# EAGLE board PCB-ARD-DUEBOS (EAGLE 6.5.0)
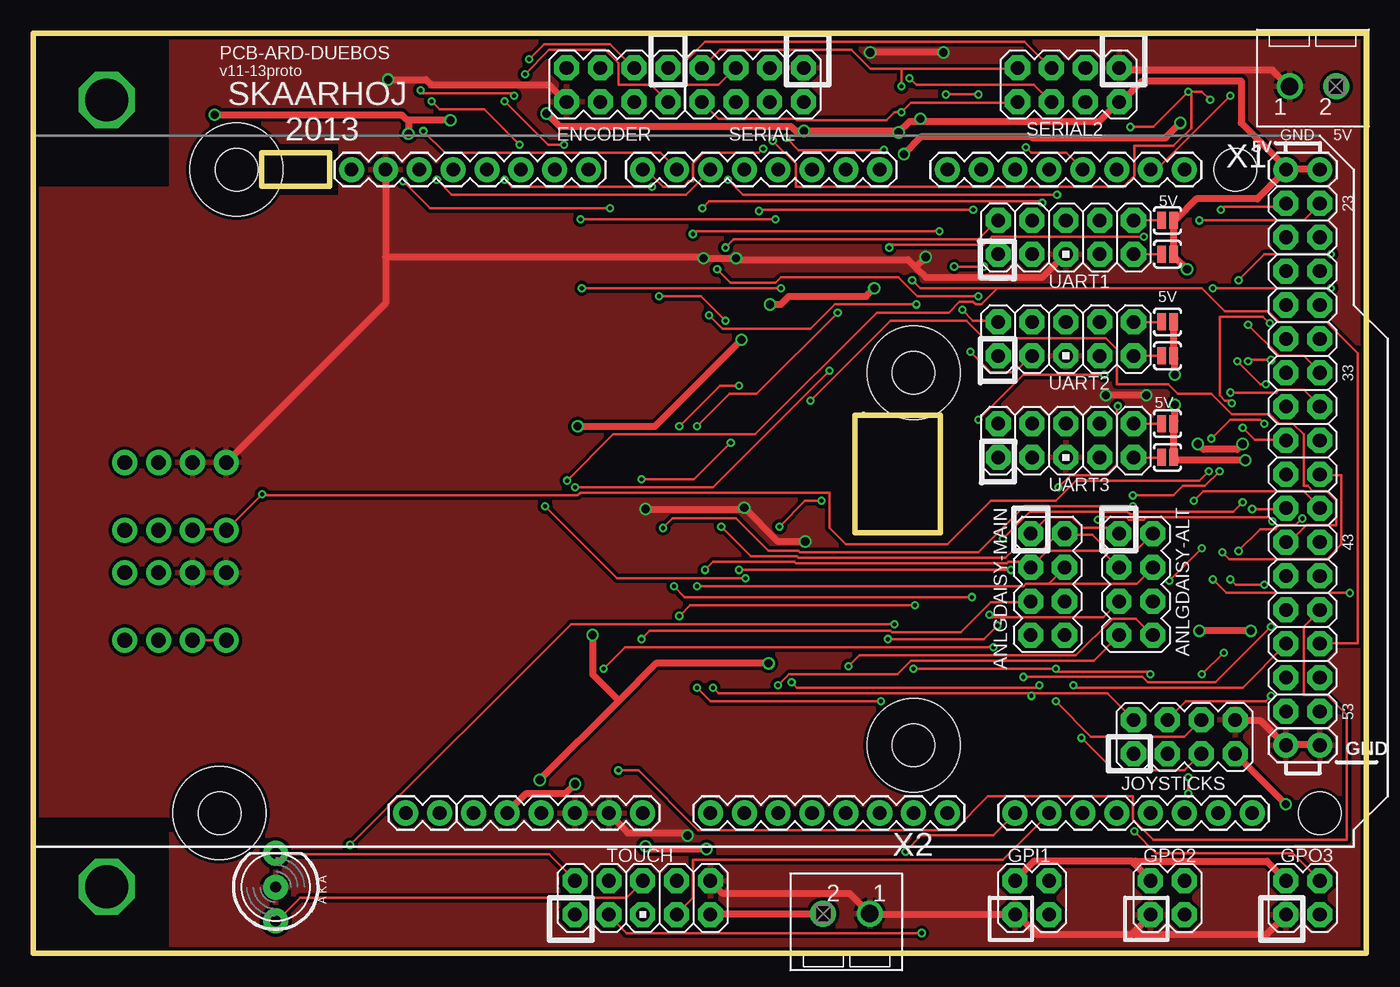
[diagram p0: board, top side]
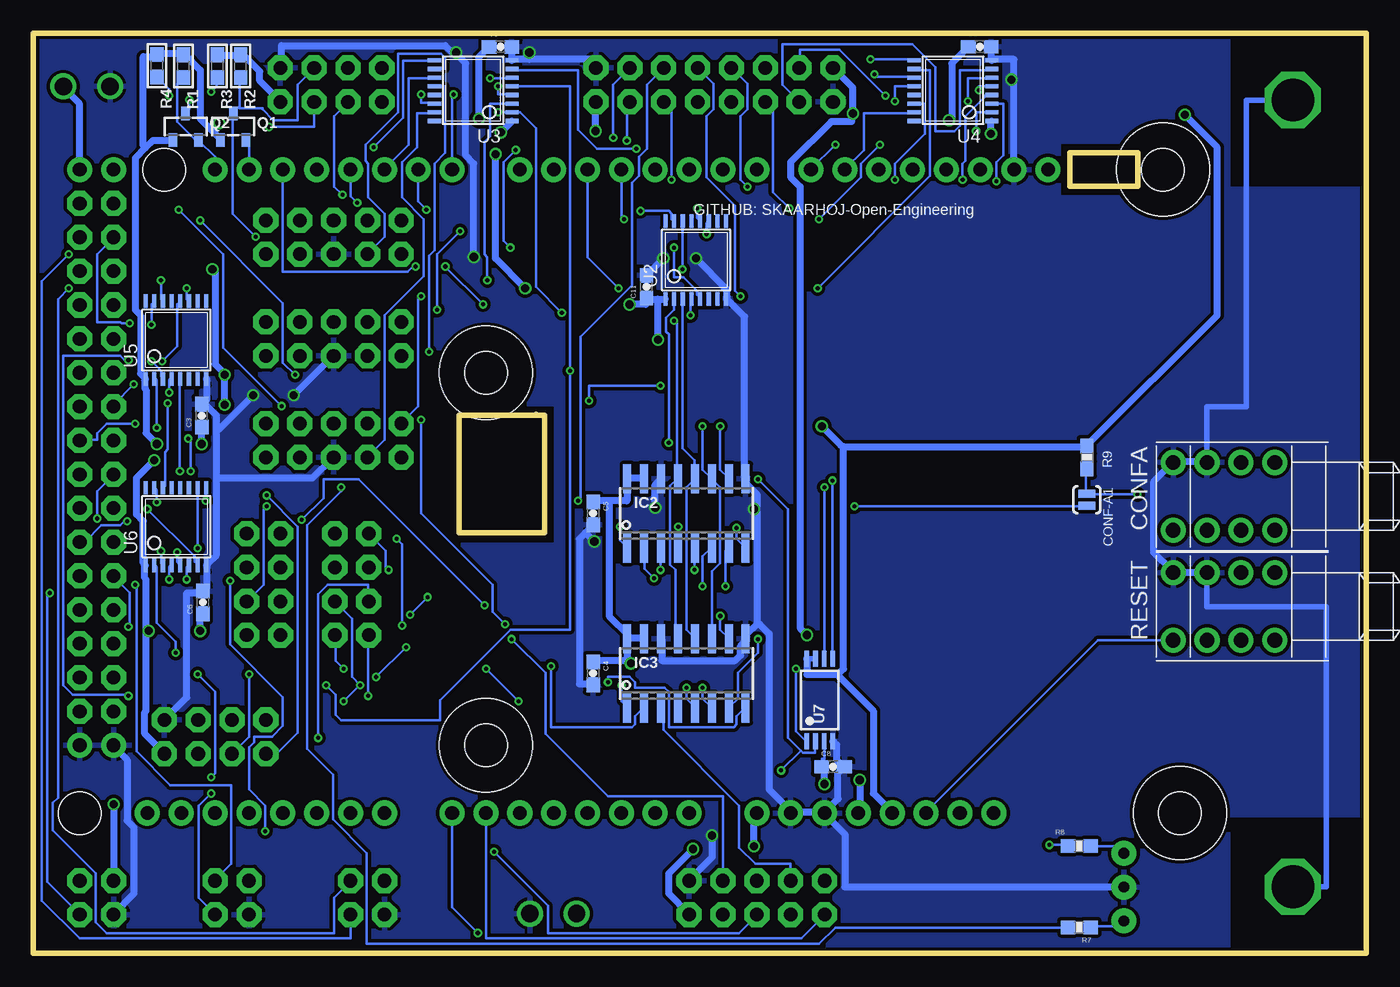
[diagram p1: board, bottom side, seen from below]

Size 100 x 69 mm. Coordinates in mm from the lower left corner, seen from the top.
Outline: 0,0 0,69 100,69 100,0 0,0
Copper layers (1*16): Top 0.035mm / dielectric 1.5mm / Bottom 0.035mm
Design rules "Fusion_eagle_rule_v1.1": minimum track width 6mil, minimum drill 12mil, track to track 6mil, track to pad 6mil, pad to pad 6mil, via to via 6mil, smd to smd 0mil, copper to edge 10mil, drill to drill 10mil, minimum pad ring 10mil, minimum via ring 6mil, stop-mask expansion 2mil, vias tented up to drill 100mil, thermal gap 10mil
Net classes: 0 default: width 0.203 mm, drill 0.305 mm, clearance 0.152 mm; 1 Power: width 0.508 mm, drill 0.61 mm, clearance 0.254 mm
Holes 7 mm at 13.97,10.53 15.24,58.78 66.04,43.55 66.04,15.61
tRestrict: area 0,0 to 10.2,10.2; area 0,57.5 to 10.2,68.9; area 61,30.8 to 68.6,41; area 16.5,56.9 to 22.9,60.7
bRestrict: area 0,57.5 to 10.2,68.9; area 0,0 to 10.2,10.2; area 61,30.8 to 68.6,41; area 16.5,56.9 to 22.9,60.7
Milling: 10 lines

## Footprints (pad centres in the part's own frame; a part is rotated, then mirrored left to right if it is on the bottom)
2X4 = drill 1.016 pad 1.88 octagon: 1 -3.81,-1.27; 2 -3.81,1.27; 3 -1.27,-1.27; 4 -1.27,1.27; 5 1.27,-1.27; 6 1.27,1.27; 7 3.81,-1.27; 8 3.81,1.27
0603-CAP = smd 1.1 x 1: 1 -0.85,0; 2 0.85,0
PUSHBUTTON = drill 1.1 pad 1.88: 1 2.54,2.54; 2 2.54,-2.54; 3 -2.54,2.54; 4 -2.54,-2.54
SJ_2S-NO = smd 0.635 x 1.27: 1 -0.45,0; 2 0.45,0
2X2 = drill 1.016 pad 1.88 octagon: 1 -3.81,-1.27; 2 -3.81,1.27; 3 -1.27,-1.27; 4 -1.27,1.27
SOIC16 = smd 0.6 x 2.2: 1 -4.445,-2.6; 2 -3.175,-2.6; 3 -1.905,-2.6; 4 -0.635,-2.6; 5 0.635,-2.6; 6 1.905,-2.6; 7 3.175,-2.6; 8 4.445,-2.6; 9 4.445,2.6; 10 3.175,2.6; 11 1.905,2.6; 12 0.635,2.6; 13 -0.635,2.6; 14 -1.905,2.6; 15 -3.175,2.6; 16 -4.445,2.6
1X02 = drill 1.016 pad 1.88: 1 0,0; 2 2.54,0
SOT23-R = smd 0.635 x 1.016: 1 -0.95,-1; 2 0.95,-1; 3 0,1
0603 = smd 1.1 x 1: 1 -0.85,0; 2 0.85,0
0603-RES = smd 1.1 x 1: 1 -0.85,0; 2 0.85,0
AVR_ICSP = drill 1.016 pad 1.88 octagon: 1 -1.27,5.08; 2 1.27,5.08; 3 -1.27,2.54; 4 1.27,2.54; 5 -1.27,0; 6 1.27,0; 7 -1.27,-2.54; 8 1.27,-2.54; 9 -1.27,-5.08; 10 1.27,-5.08
ARDUINO_MEGA = drill 1.016 pad 1.88: 0 63.5,50.8; 1 60.96,50.8; 2 58.42,50.8; 3 55.88,50.8; 3.3V 35.56,2.54; 4 53.34,50.8; 5 50.8,50.8; 5V@0 38.1,2.54; 5V@1 93.98,50.8; 5V@2 96.52,50.8; 6 48.26,50.8; 7 45.72,50.8; 8 41.656,50.8; 9 39.116,50.8; 10 36.576,50.8; 11 34.036,50.8; 12 31.496,50.8; 13 28.956,50.8; 14 68.58,50.8; 15 71.12,50.8; 16 73.66,50.8; 17 76.2,50.8; 18 78.74,50.8; 19 81.28,50.8; 20 83.82,50.8; 21 86.36,50.8; A0 50.8,2.54; A1 53.34,2.54; A2 55.88,2.54; A3 58.42,2.54; A4 60.96,2.54; A5 63.5,2.54; A6 66.04,2.54; A7 68.58,2.54; A8 73.66,2.54; A9 76.2,2.54; A10 78.74,2.54; A11 81.28,2.54; A12 83.82,2.54; A13 86.36,2.54; A14 88.9,2.54; A15 91.44,2.54; AREF 23.876,50.8; GND@0 40.64,2.54; GND@1 43.18,2.54; GND@2 93.98,7.62; GND@3 96.52,7.62; GND@4 26.416,50.8; RESET 33.02,2.54; VIN 45.72,2.54 | drill 1.016 pad 1.88 octagon: 22 93.98,48.26; 23 96.52,48.26; 24 93.98,45.72; 25 96.52,45.72; 26 93.98,43.18; 27 96.52,43.18; 28 93.98,40.64; 29 96.52,40.64; 30 93.98,38.1; 31 96.52,38.1; 32 93.98,35.56; 33 96.52,35.56; 34 93.98,33.02; 35 96.52,33.02; 36 93.98,30.48; 37 96.52,30.48; 38 93.98,27.94; 39 96.52,27.94; 40 93.98,25.4; 41 96.52,25.4; 42 93.98,22.86; 43 96.52,22.86; 44 93.98,20.32; 45 96.52,20.32; 46 93.98,17.78; 47 96.52,17.78; 48 93.98,15.24; 49 96.52,15.24; 50 93.98,12.7; 51 96.52,12.7; 52 93.98,10.16; 53 96.52,10.16 | hole 3.2: 15.24,50.8; 13.97,2.54; 66.04,35.56; 66.04,7.62; 90.17,50.8; 96.52,2.54
TSSOP16 = smd 0.305 x 0.991: 1 -3.575,-2.918; 2 -2.925,-2.918; 3 -2.275,-2.918; 4 -1.625,-2.918; 5 -0.975,-2.918; 6 -0.325,-2.918; 7 0.325,-2.918; 8 0.975,-2.918; 9 0.975,2.918; 10 0.325,2.918; 11 -0.325,2.918; 12 -0.975,2.918; 13 -1.625,2.918; 14 -2.275,2.918; 15 -2.925,2.918; 16 -3.575,2.918
TSSOP8-4.4MM = smd 1.2 x 0.35: 1 -3.1,0.975; 2 -3.1,0.325; 3 -3.1,-0.325; 4 -3.1,-0.975; 5 3.1,-0.975; 6 3.1,-0.325; 7 3.1,0.325; 8 3.1,0.975
3.2MMPAD = drill 3.2 octagon: P$1 0,0
LED5MM-BICOLOR = drill 0.813 pad 1.88: A2 2.54,0; A3 -2.54,0; K1 0,0
MSTBV2-3.5 = drill 1.3: 1 -1.75,0.02; 2 1.75,0.02

## Placement (x,y rotation side)
ANLGDAISY-ALT  M04X2  [2X4]  82.72,27.67 270 top
ANLGDAISY-MAIN  M04X2  [2X4]  76.11,27.67 270 top
C1  0.1uF  [0603-CAP]  64.95,67.98 0 bottom
C2  0.1uF  [0603-CAP]  29,68 0 bottom
C3  0.1uF  [0603-CAP]  87.36,40.33 90 bottom
C4  0.1uF  [0603-CAP]  58,21 270 bottom
C5  0.1uF  [0603-CAP]  58,33 270 bottom
C6  0.1uF  [0603-CAP]  87.27,26.32 90 bottom
C8  0.1uF  [0603-CAP]  40,14 0 bottom
C11  0.1uF  [0603-CAP]  54,50 90 bottom
CONF  [PUSHBUTTON]  9.4,34.27 90 bottom
CONF-A1  SOLDERJUMPERNO  [SJ_2S-NO]  20.95,34.02 270 bottom
CONFA  [PUSHBUTTON]  11.94,34.27 90 bottom
ENCODER  M04X2  [2X4]  43.81,65.14 180 top
GPI1  M02X2  [2X2]  77.47,4.17 0 top
GPO2  M02X2  [2X2]  87.63,4.17 0 top
GPO3  M02X2  [2X2]  97.79,4.17 0 top
IC2  MCP3008SOIC  [SOIC16]  51,33 0 bottom
IC3  MCP3008SOIC  [SOIC16]  51,21 0 bottom
JOYSTICKS  M04X2  [2X4]  86.36,16.24 0 top
JP1  [1X02]  27.94,10.53 0 top
Q1  BSS138  [SOT23-R]  85,62 0 bottom
Q2  BSS138  [SOT23-R]  88.57,62 0 bottom
R1  1K5  [0603]  88.73,66.54 90 bottom
R2  1K5  [0603]  84.44,66.54 90 bottom
R3  1K5  [0603]  86.19,66.54 90 bottom
R4  1K5  [0603]  90.72,66.57 90 bottom
R7  270R  [0603-RES]  21.52,1.95 180 bottom
R8  270R  [0603-RES]  21.52,8.04 180 bottom
R9  10K  [0603-RES]  20.95,37.2 270 bottom
RESET  [PUSHBUTTON]  11.94,26.02 90 bottom
RESETA  [PUSHBUTTON]  9.4,26.02 90 bottom
SERIAL  M04X2  [2X4]  53.98,65.14 180 top
SERIAL2  M04X2  [2X4]  77.66,65.14 180 top
SJ1  SOLDERJUMPERNO  [SJ_2S-NO]  85.09,54.98 0 top
SJ2  SOLDERJUMPERNO  [SJ_2S-NO]  85.09,52.44 180 top
SJ3  SOLDERJUMPERNO  [SJ_2S-NO]  85.09,44.81 180 top
SJ4  SOLDERJUMPERNO  [SJ_2S-NO]  85.09,47.35 0 top
SJ5  SOLDERJUMPERNO  [SJ_2S-NO]  85.09,39.73 0 top
SJ6  SOLDERJUMPERNO  [SJ_2S-NO]  85.09,37.2 180 top
TOUCH  M05X2PTH  [AVR_ICSP]  45.72,4.17 90 top
U1  ARDUINO-MEGAFULL  [ARDUINO_MEGA]  0,7.99 0 top
U2  74HC4050D  [TSSOP16]  49,52 0 bottom
U3  74HC4050D  [TSSOP16]  67,66 90 bottom
U4  74HC4050D  [TSSOP16]  31,66 90 bottom
U5  74HC4050D  [TSSOP16]  88,46 0 bottom
U6  74HC4050D  [TSSOP16]  88,32 0 bottom
U7  [TSSOP8-4.4MM]  41,19 90 bottom
U$1  GNDPAD  [3.2MMPAD]  5.5,64 0 top
U$15  LEDBICOLOR-AKA  [LED5MM-BICOLOR]  18.19,4.97 90 top
U$20  GNDPAD  [3.2MMPAD]  5.5,5 0 top
UART1  M05X2PTH  [AVR_ICSP]  77.47,53.7 90 top
UART2  M05X2PTH  [AVR_ICSP]  77.47,46.09 90 top
UART3  M05X2PTH  [AVR_ICSP]  77.47,38.47 90 top
X1  MSTBV23.5MM  [MSTBV2-3.5]  96,65 0 top
X2  MSTBV23.5MM  [MSTBV2-3.5]  61,3 180 top

## Library data of the parts
ANLGDAISY-ALT ANLGDAISY-MAIN C1-C6 C8 C11 CONF-A1 ENCODER JOYSTICKS JP1 R7-R9 SERIAL SERIAL2 SJ1-SJ6 TOUCH UART1-UART3 = SparkFun
CONF CONFA GPI1 GPO2 GPO3 IC2 IC3 RESET RESETA U1-U6 U$1 U$15 U$20 X1 X2 = SKAARHOJ
Q1 Q2 R1-R4 U7 = microbuilder

## Nets
3.3V [Power]: C2.1 C3.1 C8.1 C11.1 Q1.1 Q2.1 R1.2 R4.2 R9.1 U1.3.3V U2.1 U4.1 U5.1 U7.3 U7.7 U7.8
5V [Power]: C1.1 C4.1 C5.1 C6.1 ENCODER.7 GPI1.2 GPO2.2 GPO3.2 IC2.15 IC2.16 IC3.15 IC3.16 JOYSTICKS.7 R2.2 R3.2 SERIAL2.2 SERIAL.2 SJ1.2 SJ2.1 SJ3.1 SJ4.2 SJ5.2 SJ6.1 U1.5V@0 U1.5V@1 U1.5V@2 U3.1 U6.1 X1.2
A0: IC2.1 SERIAL2.5 SERIAL.5
A1: CONF-A1.2 IC2.2
A2: ANLGDAISY-ALT.1 ANLGDAISY-MAIN.1 IC2.3
A3: ANLGDAISY-ALT.2 ANLGDAISY-MAIN.2 IC2.4
A4: ANLGDAISY-ALT.3 ANLGDAISY-MAIN.3 IC2.5
A5: ANLGDAISY-ALT.4 ANLGDAISY-MAIN.4 IC2.6
A6: ANLGDAISY-ALT.5 IC2.7
A6_3.3V: TOUCH.1 U1.A6
A7: ANLGDAISY-ALT.6 IC2.8
A7_3.3V: TOUCH.3 U1.A7
A8: ANLGDAISY-ALT.7 IC3.1
A8_3.3V: TOUCH.5 U1.A8
A9: ANLGDAISY-ALT.8 IC3.2
A9_3.3V: TOUCH.7 U1.A9
A10: IC3.3 TOUCH.4
A11: IC3.4
A12: ANLGDAISY-MAIN.7 IC3.5 JOYSTICKS.2
A13: ANLGDAISY-MAIN.8 IC3.6 JOYSTICKS.3
A14: ANLGDAISY-MAIN.5 IC3.7 JOYSTICKS.5
A15: ANLGDAISY-MAIN.6 IC3.8 JOYSTICKS.6
ADC1_CS: IC2.10 U1.42
ADC2_CS: IC3.10 U1.43
D2_3.3V: U1.2 U4.10
D2_5.0V: ENCODER.3 U4.9
D3_3.3V: U1.3 U4.6
D3_5.0V: ENCODER.6 U4.7
D4: U1.4
D5_3.3V: U1.5 U4.4
D5_5.0V: ENCODER.5 U4.5
D6_3.3V: U1.6 U4.2
D6_5.0V: ENCODER.4 U4.3
D7_3.3V: U1.7 U3.7
D7_5.0V: SERIAL2.6 SERIAL.6 U3.6
D8_3.3V: U1.8 U4.12
D8_5.0V: ENCODER.2 U4.11
D9_3.3V: U1.9 U4.15
D9_5.0V: ENCODER.1 U4.14
D22: R7.2 U1.22
D23: R8.2 U1.23
D24_3.3V: U1.24 U6.14
D24_5.0V: TOUCH.8 U6.15
D37: CONF-A1.1 CONF.3 CONFA.3 R9.2 U1.37
EEPROM_CS: U1.44 U7.1
EXT1: U1.25
EXT2: U1.26
EXT3: U1.27
EXT4: U1.28
EXT5: U1.29
EXT6: U1.30
EXT7: U1.31
EXT8: U1.32
GND [Power]: C1.2 C2.2 C3.2 C4.2 C5.2 C6.2 C8.2 C11.2 CONF.1 CONFA.1 ENCODER.8 GPI1.1 GPO2.1 GPO3.1 IC2.9 IC2.14 IC3.9 IC3.14 JOYSTICKS.8 RESET.1 RESETA.1 SERIAL2.1 SERIAL.1 TOUCH.10 U1.GND@0 U1.GND@1 U1.GND@2 U1.GND@3 U1.GND@4 U2.8 U3.8 U4.8 U5.8 U6.8 U7.4 U$1.P$1 U$15.K1 U$20.P$1 UART1.5 UART2.5 UART3.5 X1.1 X2.1
GPI1-1_3.3V: U1.33 U5.15
GPI1-1_5.0V: GPI1.3 U5.14
GPI1-2_3.3V: U1.34 U5.12
GPI1-2_5.0V: GPI1.4 U5.11
GPO2-1_3.3V: U1.38 U6.3
GPO2-1_5.0V: GPO2.3 U6.2
GPO2-2_3.3V: U1.39 U6.5
GPO2-2_5.0V: GPO2.4 U6.4
GPO3-1_3.3V: U1.40 U6.7
GPO3-1_5.0V: GPO3.3 U6.6
GPO3-2_3.3V: U1.41 U6.9
GPO3-2_5.0V: GPO3.4 U6.10
MISO_3.3V: U1.47 U2.2 U7.2
MISO_5.0V: IC2.12 IC3.12 U2.3
MOSI_3.3V: U1.49 U3.3 U7.5
MOSI_5.0V: IC2.11 IC3.11 SERIAL2.8 SERIAL.8 U3.2
N$1: U5.6
N$2: U5.10
N$3: SJ6.2 UART3.9
N$4: U5.9
N$5: U5.7
N$6: SJ3.2 UART2.9
N$9: SJ2.2 UART1.9
N$10: SJ1.1 UART1.10
N$12: SJ4.1 UART2.10
N$13: SJ5.1 UART3.10
N$17: R8.1 TOUCH.2 U$15.A2
N$18: U1.53
N$19: U1.52
N$20: U1.51
N$21: U1.50
N$22: R7.1 TOUCH.6 U$15.A3
RESET: RESET.3 RESETA.3 U1.RESET
RXD1_3.3V: U1.19 U2.4
RXD1_5.0V: U2.5 UART1.2
RXD2_3.3V: U1.17 U2.12
RXD2_5.0V: U2.11 UART2.2
RXD3_3.3V: U1.15 U2.15
RXD3_5.0V: U2.14 UART3.2
SCL_3.3V: Q2.2 R1.1 U1.21
SCL_5.0V: Q2.3 R3.1 SERIAL2.4 SERIAL.4
SCLK_3.3V: U1.48 U3.5 U7.6
SCLK_5.0V: IC2.13 IC3.13 SERIAL2.7 SERIAL.7 U3.4
SDA_3.3V: Q1.2 R4.1 U1.20
SDA_5.0V: Q1.3 R2.1 SERIAL2.3 SERIAL.3
SW1_3.3V: U1.35 U5.4
SW1_5.0: JOYSTICKS.1 U5.5
SW2_3.3V: U1.36 U5.2
SW2_5.0: JOYSTICKS.4 U5.3
TXD1_3.3V: U1.18 U3.9
TXD1_5.0V: U3.10 UART1.3
TXD2_3.3V: U1.16 U3.11
TXD2_5.0V: U3.12 UART2.3
TXD3_3.3V: U1.14 U3.14
TXD3_5.0V: U3.15 UART3.3
VIN [Power]: TOUCH.9 U1.VIN X2.2

## Tracks (layer width: path | path; a pad name or v marks a point on that pad's centre or on a via)
3.3V  (via drill 0.61)
  Top 0.508: v87.38,38.2 87.78,37.8 90.32,37.8 v90.73,38.2 | v40.64,12.7 39.93,11.99 36.98,11.99 35.56,10.57 U1.3.3V | 28.14,62.48 v28.14,61.47 | v31.29,62.48 28.14,62.48 | v53.14,46.02 46.63,39.52 v40.84,39.52 | v13.61,62.89 27.64,62.89 27.94,62.59 28.14,62.48 | v86.06,62.28 84.94,61.16 74.98,61.16 74.88,61.27 66.65,61.27 v65.33,59.94 | v63.09,49.89 62.48,49.28 56.69,49.28 56.08,48.67 v55.27,48.67
  Bottom 0.203: U7.3 40.64,15.9 40.64,14.61 40.85,14.61 C8.1
  Bottom 0.406: U7.7 U7.8
  Bottom 0.508: 86.61,61.72 87.48,62.59 87.48,66.24 88.7,67.46 R1.2 88.9,67.46 90.63,67.46 R4.2 90.93,67.26 91.75,67.26 91.75,60.55 91.59,60.4 | 86.61,61.72 85.95,61.06 Q1.1 | 91.59,60.4 91.03,60.96 89.61,60.96 Q2.1 | 91.59,60.4 92.35,59.64 92.35,48.26 91.95,47.85 91.95,43.48 91.64,43.18 U5.1 91.64,42.88 91.64,42.37 91.54,42.27 91.54,39.01 v90.73,38.2 | v87.38,38.2 87.38,39.42 C3.1 | v40.64,12.7 40.64,13.72 40.84,13.92 C8.1 | v28.14,61.47 28.14,62.38 U4.1 | v31.29,62.48 31.09,62.69 31.09,66.75 29.87,67.97 C2.1 | 53.14,49.07 53.95,49.07 C11.1 54.05,48.87 54.05,48.67 v55.27,48.67 | 53.14,49.07 52.63,49.07 U2.1 | 39.22,38 21.03,38 R9.1 20.83,38.2 11.18,47.85 11.18,60.45 v13.61,62.89 | 39.22,38 39.22,21.34 39.62,20.93 | 39.62,20.93 41.96,20.93 41.96,22.05 U7.8 | v53.14,46.02 53.14,49.07 | v40.84,39.52 39.42,38.1 39.22,38 | U1.3.3V 35.56,10.57 36.98,11.99 36.98,18.19 39.52,20.73 39.62,20.93 | v86.06,62.28 86.61,61.72 | v65.33,59.94 65.33,52.12 v63.09,49.89
5V  (via drill 0.61)
  Top 0.508: 82.55,6.76 83.82,5.49 GPO2.2 | 82.55,6.76 82.4,6.91 75.08,6.91 73.66,5.49 GPI1.2 | GPO3.2 93.98,5.49 92.56,6.91 82.7,6.91 82.55,6.76 | SJ4.2 85.55,44.91 SJ3.1 85.65,44.6 v85.65,43.38 | v91.34,24.18 v87.48,24.18 | v90.93,36.98 85.85,36.98 85.75,37.08 SJ6.1 85.55,37.29 SJ5.2 85.65,39.93 v85.65,41.15 | v93.98,11.18 90.22,14.94 JOYSTICKS.7 | 43.94,18.95 46.74,21.74 v55.17,21.74 | 43.94,18.95 v38,13.01 | U1.5V@1 93.98,58.73 91.85,56.59 87.27,56.59 85.75,55.07 SJ1.2 85.55,54.97 85.55,52.53 SJ2.1 85.65,52.22 v86.56,51.31 | U1.5V@2 96.52,58.83 94.18,58.83 U1.5V@1 | 66.55,62.38 79.96,62.38 81.38,63.8 SERIAL2.2 81.69,63.91 83.21,65.43 90.63,65.43 90.63,62.28 93.88,59.03 U1.5V@1 | 66.55,62.38 65.73,62.38 v64.92,61.57 64.72,61.67 v57.81,61.67 57.2,61.67 56.9,61.98 39.52,61.98 v38.51,62.99 | v66.55,62.59 66.55,62.38 | 43.94,18.95 41.96,20.93 v41.96,23.88
  Bottom 0.508: 91.64,29.06 91.64,28.14 91.54,28.04 91.54,24.18 | 91.54,24.18 91.54,18.19 91.64,18.09 91.64,16.46 90.22,15.04 JOYSTICKS.7 | 91.64,29.06 U6.1 | v87.48,24.18 87.48,25.2 87.27,25.4 C6.1 | v91.34,24.18 91.54,24.18 | v90.93,36.98 92.25,35.66 92.25,32.92 91.75,32.41 91.75,29.26 91.64,29.06 | v85.65,41.15 v85.65,43.38 85.75,43.59 86.36,44.2 86.36,51.1 v86.56,51.31 | v93.98,11.18 GPO3.2 | 55.47,21.95 57.91,21.95 C4.1 | 55.47,21.95 55.47,23.57 IC3.16 | IC3.15 54.25,23.67 55.27,23.67 IC3.16 | 56.79,33.93 55.47,33.93 55.47,35.56 IC2.16 55.27,35.66 54.25,35.66 IC2.15 | 56.79,33.93 57.91,33.93 C5.1 | 56.79,33.93 56.79,25.3 55.37,23.88 IC3.16 | v38,13.01 38,10.67 38.1,10.57 U1.5V@0 | v55.17,21.74 55.27,21.84 55.47,21.95 | U1.5V@2 96.52,63.7 97.74,64.92 X1.2 | R3.2 86.16,67.36 84.53,67.36 R2.2 84.23,67.36 83.01,66.14 83.01,65.43 81.48,63.91 SERIAL2.2 | v64.92,61.57 64.11,62.38 U3.1 | v66.55,62.59 66.55,67.26 65.84,67.97 C1.1 | ENCODER.7 39.93,66.34 38.51,64.92 v38.51,62.99 38.61,62.79 38.61,62.38 40.13,62.38 43.18,59.33 43.18,58.22 42.47,57.51 42.47,24.38 v41.96,23.88 | v57.81,61.67 57.81,63.8 SERIAL.2
A0  (via drill 0.3)
  Top 0.203: v55.98,32 57.91,33.93 v59.13,33.93 | SERIAL2.5 76.3,66.45 74.37,68.38 50.39,68.38 48.97,66.95 48.97,65.13 51.41,65.13 52.63,66.34 SERIAL.5
  Bottom 0.203: v55.98,32 55.98,30.99 55.47,30.48 IC2.1 | v59.13,33.93 58.93,34.14 58.93,46.23 55.07,50.09 55.07,57.81 54.56,58.32 54.56,59.74 53.95,60.35 53.95,65.13 52.73,66.34 SERIAL.5
A1  (via drill 0.3)
  Top 0.203: v38.41,33.53 43.79,28.14 v53.44,28.14
  Bottom 0.203: v38.41,33.53 21.03,33.53 CONF-A1.2 | v53.44,28.14 54.15,28.85 54.15,30.38 IC2.2
A2  (via drill 0.3)
  Top 0.203: v73.36,28.75 v52.93,28.75 | ANLGDAISY-ALT.1 81.38,31.5 80.97,31.9 78.74,31.9 77.93,32.72 76.1,32.72 74.88,31.5 ANLGDAISY-MAIN.1
  Bottom 0.203: v52.93,28.75 52.93,30.38 IC2.3 | v73.36,28.75 73.56,28.96 73.56,30.18 74.78,31.39 ANLGDAISY-MAIN.1
A3  (via drill 0.3)
  Top 0.203: v51.61,32 53.85,29.77 57.3,29.77 57.4,29.67 72.95,29.67 73.56,30.28 75.69,30.28 76.81,31.39 77.32,31.39 ANLGDAISY-MAIN.2 77.42,31.39 79.45,31.39 80.57,30.28 82.8,30.28 83.92,31.39 ANLGDAISY-ALT.2
  Bottom 0.203: v51.61,32 51.61,30.48 IC2.4
A4  (via drill 0.3)
  Top 0.203: v50.39,28.75 51,29.36 57.1,29.36 57.2,29.26 73.05,29.26 73.15,29.36 74.37,29.36 74.78,28.96 ANLGDAISY-MAIN.3 74.88,28.96 76.1,30.18 80.16,30.18 81.38,28.96 ANLGDAISY-ALT.3
  Bottom 0.203: v50.39,28.75 50.39,30.38 IC2.5
A5  (via drill 0.3)
  Top 0.203: v49.78,27.53 74.27,27.53 74.47,27.74 76.2,27.74 76.25,27.79 | 76.25,27.79 77.32,28.85 ANLGDAISY-MAIN.4 | ANLGDAISY-ALT.4 83.92,28.85 82.8,27.74 76.3,27.74 76.25,27.79
  Bottom 0.203: v49.78,27.53 49.78,29.77 49.17,30.38 IC2.6
A6  (via drill 0.3)
  Top 0.203: v48.06,27.53 48.87,26.72 v70.41,26.72 | v71.73,25.4 71.93,25.2 80.26,25.2 81.38,26.31 ANLGDAISY-ALT.5
  Bottom 0.203: v48.06,27.53 48.06,30.18 47.85,30.38 IC2.7 | v71.73,25.4 v70.41,26.72
A6_3.3V
  Bottom 0.203: U1.A6 66.04,1.12 42.37,1.12 40.64,2.85 TOUCH.1
A7  (via drill 0.3)
  Top 0.203: v47.24,31.9 47.95,32.61 52.73,32.61 55.17,30.18 57.4,30.18 57.51,30.07 70.92,30.07 74.37,33.53 v82.5,33.53
  Bottom 0.203: v47.24,31.9 47.24,31.09 46.63,30.48 IC2.8 | v82.5,33.53 82.7,33.33 82.7,27.64 83.92,26.42 ANLGDAISY-ALT.6
A7_3.3V  (via drill 0.3)
  Top 0.203: v66.65,1.52 44.5,1.52 43.18,2.85 TOUCH.3
  Bottom 0.203: v66.65,1.52 68.58,3.45 U1.A7
A8  (via drill 0.3)
  Top 0.203: v55.88,20.12 56.69,20.93 64.82,20.93 65.84,21.95 79.55,21.95 81.38,23.77 ANLGDAISY-ALT.7
  Bottom 0.203: v55.88,20.12 55.88,18.9 55.47,18.49 IC3.1
A8_3.3V  (via drill 0.3)
  Top 0.203: v65.43,7.62 66.65,8.84 72.03,8.84 73.66,10.46 U1.A8
  Bottom 0.203: v65.43,7.62 61.37,3.56 61.37,1.52 47.04,1.52 45.72,2.85 TOUCH.5
A9  (via drill 0.3)
  Top 0.203: v61.16,21.54 61.98,22.35 78.23,22.35 80.97,25.09 82.7,25.09 83.92,23.88 ANLGDAISY-ALT.8
  Bottom 0.203: v61.16,21.54 61.16,16.97 55.07,16.97 54.86,17.17 54.86,17.78 54.25,18.39 IC3.2
A9_3.3V
  Top 0.203: TOUCH.7 48.26,2.95 49.48,4.17 49.48,7.01 72.75,7.01 76.2,10.46 U1.A9
A10
  Bottom 0.203: TOUCH.4 43.18,6.71 45.82,6.71 47.04,7.92 47.04,11.07 52.73,16.76 52.73,18.29 52.83,18.39 IC3.3
A12  (via drill 0.3)
  Top 0.203: v51,19.91 51.41,19.51 74.88,19.51 | 74.88,19.51 80.57,19.51 82.5,17.58 JOYSTICKS.2 | 74.88,19.51 v74.88,19.3
  Bottom 0.203: v51,19.91 51,19.1 50.39,18.49 IC3.5 | v74.88,19.3 74.88,23.77 ANLGDAISY-MAIN.7
A13  (via drill 0.3)
  Top 0.203: v49.78,19.91 50.8,18.9 v63.6,18.9 | v66.04,21.34 v76.71,21.34 76.91,21.13 83.62,21.13 v83.82,20.93
  Bottom 0.203: v49.78,19.91 49.78,19.1 49.17,18.49 IC3.6 | v66.04,21.34 v63.6,18.9 | v76.71,21.34 77.32,21.95 77.32,23.77 ANLGDAISY-MAIN.8 | v83.82,20.93 83.82,16.26 85.04,15.04 JOYSTICKS.3
A14  (via drill 0.3)
  Top 0.203: v45.62,23.57 46.23,24.18 64.31,24.18 64.41,24.08 69.6,24.08 71.83,26.31 74.78,26.31 ANLGDAISY-MAIN.5 | v78.64,16.15 81.08,13.72 86.36,13.72 87.58,14.94 JOYSTICKS.5
  Bottom 0.203: v45.62,23.57 45.62,22.55 47.14,21.03 47.14,19.1 47.75,18.49 IC3.7 | v78.64,16.15 78.64,26.92 77.93,27.64 74.88,27.64 74.88,26.42 ANLGDAISY-MAIN.5
A15  (via drill 0.3)
  Top 0.203: v56.9,20.32 57.3,19.91 75.29,19.91 v75.49,20.12 | v76.71,18.9 79.35,16.26 86.36,16.26 87.58,17.48 JOYSTICKS.6
  Bottom 0.203: v56.9,20.32 56.9,20.73 55.27,20.73 54.86,20.32 54.86,19.91 52.63,19.91 52.32,19.61 52.32,16.97 47.45,16.97 47.24,17.17 47.24,17.78 46.63,18.39 IC3.8 | ANLGDAISY-MAIN.6 77.32,26.31 76.1,25.09 76.1,20.73 v75.49,20.12 75.59,20.12 75.59,20.02 v76.71,18.9
ADC1_CS  (via drill 0.3)
  Top 0.203: v48.46,39.52 51.51,42.57 v52.93,42.57 | v58.32,41.45 64.31,47.45 70,47.45 71.32,46.13 80.47,46.13 81.28,45.31 81.28,42.67 85.14,42.67 85.85,41.96 88.39,41.96 89.92,40.44 92.76,40.44 93.47,39.73 94.49,39.73 95.3,38.91 95.3,35.05 95.61,35.05 96.01,34.65 97.03,34.65 97.74,33.93 97.74,32.11 95.5,32.11 94.28,30.89 93.98,30.89 U1.42
  Bottom 0.203: v48.46,39.52 48.46,36.27 47.85,35.66 IC2.10 | v52.93,42.57 58.32,42.57 v58.32,41.45
ADC2_CS  (via drill 0.3)
  Top 0.203: v48.46,25.3 49.28,26.11 v66.14,26.11 | v79.86,32.51 80.06,32.72 81.99,32.72 82.19,32.51 83.31,32.51 83.52,32.72 92.66,32.72 v92.96,32.41
  Bottom 0.203: v48.46,25.3 48.46,24.28 47.85,23.67 IC3.10 | v66.14,26.11 75.59,35.56 78.23,35.56 78.23,34.14 v79.86,32.51 | v92.96,32.41 93.17,32.41 93.47,32.11 94.89,32.11 96.11,30.89 96.52,30.89 U1.43
D2_3.3V  (via drill 0.3)
  Top 0.203: v56.08,49.89 v41.15,49.89
  Bottom 0.203: v41.15,49.89 32.72,58.32 32.72,66.24 33.83,66.24 U4.10 | v56.08,49.89 58.42,52.22 U1.2
D2_5.0V  (via drill 0.3)
  Top 0.203: v37.19,67.06 38.3,68.17 43.28,68.17 45.01,66.45 ENCODER.3
  Bottom 0.203: v37.19,67.06 33.93,67.06 U4.9
D3_3.3V  (via drill 0.3)
  Top 0.203: v29.87,63.91 30.48,63.3 33.83,63.3 v36.47,60.66 | v55.68,55.07 v41.05,55.07
  Bottom 0.203: v29.87,63.91 29.87,65.63 28.14,65.63 U4.6 | v36.47,60.66 37.9,59.23 37.9,58.22 v41.05,55.07 | v55.68,55.07 55.88,55.27 U1.3
D3_5.0V
  Bottom 0.203: U4.7 28.14,66.24 30.48,66.24 30.48,62.08 30.89,61.67 32.31,61.67 32.31,66.45 34.04,68.17 43.79,68.17 43.79,65.13 42.57,63.91 ENCODER.6
D5_3.3V  (via drill 0.3)
  Top 0.203: v30.28,58.01 31.39,56.9 48.97,56.9 50.8,58.73 U1.5
  Bottom 0.203: v30.28,58.01 30.28,59.23 30.07,59.44 30.07,62.79 28.65,64.21 28.65,64.31 28.14,64.31 U4.4
D5_5.0V  (via drill 0.3)
  Top 0.203: v29.06,64.72 29.26,64.52 35.87,64.52 v36.07,64.31
  Bottom 0.203: v29.06,64.72 29.06,65.02 28.14,65.02 U4.5 | v36.07,64.31 39.52,67.77 42.47,67.77 42.47,66.45 ENCODER.5
D6_3.3V  (via drill 0.3)
  Top 0.203: v29.26,61.67 30.89,60.05 47.04,60.05 48.26,58.83 U1.6
  Bottom 0.203: v29.26,61.67 29.26,63.09 28.14,63.09 U4.2
D6_5.0V  (via drill 0.3)
  Top 0.203: v27.74,57.91 29.77,55.88 v43.28,55.88
  Bottom 0.203: v27.74,57.91 27.74,59.33 27.23,59.84 27.23,63.7 28.04,63.7 U4.3 | v43.28,55.88 44.5,57.1 44.5,63.3 45.01,63.8 ENCODER.4
D7_3.3V  (via drill 0.3)
  Top 0.203: v54.76,60.35 54.46,60.05 50.29,60.05 49.48,59.23 49.48,57.91 49.17,57.91 48.77,57.51 47.24,57.51 46.02,58.73 45.72,58.73 U1.7
  Bottom 0.203: v54.76,60.35 57.71,60.35 59.13,61.77 59.13,66.24 64.01,66.24 U3.7
D7_5.0V  (via drill 0.3)
  Top 0.203: v65.73,65.63 66.24,65.13 75.08,65.13 76.3,63.91 SERIAL2.6 | v52.12,58.01 53.24,56.9 v76.81,56.9
  Bottom 0.203: v65.73,65.63 64.11,65.63 U3.6 | v52.12,58.01 52.12,63.3 52.63,63.8 SERIAL.6 | v76.81,56.9 77.42,57.51 77.42,62.79 76.4,63.8 SERIAL2.6
D8_3.3V  (via drill 0.3)
  Top 0.203: v35.36,63.91 38.61,60.66 v39.83,60.66
  Bottom 0.203: v35.36,63.91 35.36,65.02 33.93,65.02 U4.12 | v39.83,60.66 41.66,58.83 U1.8
D8_5.0V  (via drill 0.3)
  Top 0.203: v36.88,65.94 38.71,67.77 42.88,67.77 43.89,66.75 43.89,65.13 46.33,65.13 47.55,63.91 ENCODER.2
  Bottom 0.203: v36.88,65.94 36.88,65.73 33.93,65.73 U4.11
D9_3.3V
  Bottom 0.203: U4.15 33.93,62.99 37.69,62.99 37.69,60.25 39.12,58.83 U1.9
D9_5.0V  (via drill 0.3)
  Top 0.203: v35.36,58.01 35.87,57.51 v46.43,57.51
  Bottom 0.203: v35.36,58.01 35.36,59.23 33.12,61.47 33.12,63.7 33.83,63.7 U4.14 | v46.43,57.51 46.94,58.01 46.94,62.79 46.43,63.3 46.43,65.23 47.55,66.34 ENCODER.1
D22  (via drill 0.3)
  Top 0.203: v76.91,34.95 77.83,35.87 80.47,35.87 81.28,36.68 81.28,41.05 v81.38,41.05 | v89.1,55.78 89.31,55.98 93.78,55.98 93.98,56.19 U1.22
  Bottom 0.203: v76.91,34.95 76.91,34.65 79.45,32.11 79.45,15.34 77.52,13.41 77.52,10.06 74.98,7.52 74.98,0.71 41.05,0.71 39.83,1.93 22.45,1.93 R7.2 | v81.38,41.05 85.75,45.41 85.75,52.43 v89.1,55.78
D23  (via drill 0.3)
  Top 0.203: v23.77,8.13 40.34,24.69 v64.62,24.69 | v70.92,40.03 74.27,43.38 v80.37,43.38 | v87.48,54.97 95.3,54.97 96.52,56.19 U1.23
  Bottom 0.203: v23.77,8.13 22.45,8.13 R8.2 | v64.62,24.69 65.53,25.6 65.53,27.64 70.92,33.02 v70.92,40.03 | v80.37,43.38 81.28,44.3 81.28,48.77 v87.48,54.97
D24_3.3V  (via drill 0.3)
  Top 0.203: v89.92,41.25 89.71,41.45 89.41,41.45 89,41.86 89,47.75 92.25,47.75 v92.76,47.24
  Bottom 0.203: v89.92,41.25 89.92,37.8 90.12,37.59 90.12,35.05 90.22,34.95 U6.14 | v92.76,47.24 93.37,47.24 93.47,47.35 95.2,47.35 95.2,52.43 93.98,53.65 U1.24
D24_5.0V  (via drill 0.3)
  Top 0.203: v90.73,33.83 90.02,33.12 82.91,33.12 82.7,32.92 82.3,32.92 82.09,33.12 74.78,33.12 v72.75,31.09 | v72.34,24.59 71.32,23.57 v64.11,23.57
  Bottom 0.203: v90.73,33.83 90.73,34.75 90.83,34.85 U6.15 | v72.75,31.09 72.34,30.68 v72.34,24.59 | v64.11,23.57 61.57,21.03 61.57,16.46 56.9,11.79 48.26,11.79 TOUCH.8
D37  (via drill 0.3)
  Top 0.203: CONF.3 11.99,31.8 14.43,31.8 CONFA.3 14.53,31.8 v17.17,34.44 17.17,34.34 40.84,34.34 41.05,34.54 59.74,34.54 59.74,31.9 60.96,30.68 68.58,30.68 71.83,33.93 76.71,33.93 78.23,35.46 87.48,35.46 v88.19,36.17 | v92.35,39.73 92.05,40.03 89.81,40.03 v88.39,38.61
  Bottom 0.203: R9.2 21.03,36.27 21.03,34.54 CONF-A1.1 20.93,34.44 v17.17,34.44 | v92.35,39.73 94.49,39.73 95.2,39.01 95.2,38.51 96.52,38.51 U1.37 | v88.39,38.61 88.19,38.41 v88.19,36.17
EEPROM_CS  (via drill 0.3)
  Top 0.203: v42.77,21.34 44.4,22.96 v72.03,22.96 | v74.27,20.73 83.21,20.73 83.62,20.32 88.7,20.32 v92.86,24.49
  Bottom 0.203: v42.77,21.34 42.77,16.66 42.06,15.95 U7.1 | v74.27,20.73 v72.03,22.96 | v92.86,24.49 92.76,24.59 92.76,27.03 93.98,28.25 U1.44
GND  (via drill 0.61)
  Top 0.508: TOUCH.10 50.8,5.38 51.71,4.47 61.27,4.47 62.69,3.05 X2.1 62.99,2.95 73.66,2.95 GPI1.1 73.86,2.85 75.29,1.42 82.4,1.42 82.55,1.57 | 82.55,1.57 83.82,2.85 GPO2.1 | GPO3.1 93.98,2.85 92.56,1.42 82.7,1.42 82.55,1.57 | U1.GND@3 96.52,15.65 93.98,15.65 U1.GND@2 93.78,15.75 92.05,17.48 90.22,17.48 JOYSTICKS.8 | v83.52,41.86 v80.47,41.86 | v26.62,65.53 29.46,65.53 29.87,65.13 38.71,65.13 39.93,63.91 ENCODER.8 | U1.GND@4 26.42,52.22 | 26.42,52.22 26.42,48.77 14.53,36.88 CONFA.1 | SERIAL2.1 81.48,66.34 81.58,66.24 92.96,66.24 94.18,65.02 X1.1 | v68.28,67.56 v62.79,67.56 | v57.91,30.89 55.88,30.89 v53.34,33.43 53.14,33.33 v45.92,33.33 | 66.19,51.46 65.63,52.02 52.93,52.02 v52.73,52.12 v50.29,52.12 50.09,52.22 26.42,52.22 | 66.19,51.46 66.95,50.7 75.69,50.7 77.42,52.43 UART1.5 | 66.19,51.46 v66.95,52.22 | v49.07,8.84 48.87,9.04 44.6,9.04 43.18,10.46 U1.GND@1
  Bottom 0.406: U$1.P$1 9,64 9,41 11.94,41 CONF.1 | U$20.P$1 3,5 3,26 11.94,26 RESETA.1
  Bottom 0.508: U5.8 86.97,43.08 86.97,41.55 87.27,41.25 C3.2 87.07,41.15 86.26,40.34 86.26,39.32 | 86.97,29.06 86.97,27.43 87.17,27.23 C6.2 87.48,27.03 88.49,27.03 88.49,19.2 90.12,17.58 JOYSTICKS.8 | 86.97,29.06 U6.8 | 86.26,35.66 86.26,29.87 86.87,29.26 86.97,29.06 | 86.26,35.66 86.26,39.32 | 86.26,35.66 79.05,35.66 77.52,37.19 UART3.5 | v80.47,41.86 77.52,44.81 UART2.5 | v83.52,41.86 86.06,39.32 86.26,39.32 | GPO3.1 93.98,2.95 92.46,4.47 92.46,9.45 92.96,9.96 92.96,14.53 93.98,15.54 U1.GND@2 | RESETA.1 12.09,28.55 14.43,28.55 RESET.1 14.63,28.75 15.95,30.07 15.95,35.36 14.53,36.78 CONFA.1 14.22,36.88 12.09,36.88 CONF.1 | C2.2 28.14,67.97 28.14,67.06 U4.8 27.84,67.06 26.42,67.06 26.42,65.53 | U1.GND@4 26.42,65.53 | v26.62,65.53 26.42,65.53 | C1.2 64.11,67.06 U3.8 63.91,67.06 62.79,67.06 | 62.79,67.06 57.81,67.06 57.81,66.45 SERIAL.1 | v62.79,67.56 62.79,67.06 | SERIAL2.1 81.38,66.45 81.38,68.07 69.09,68.07 68.58,67.56 v68.28,67.56 68.17,67.36 67.56,66.75 67.56,59.84 66.95,59.23 v66.95,52.22 | U7.4 39.93,15.85 39.73,15.65 39.73,14.53 39.22,14.02 C8.2 39.32,13.82 39.62,13.51 39.62,11.58 40.64,10.57 U1.GND@0 | U$15.K1 18.29,4.98 39.12,4.98 39.12,8.94 40.54,10.36 U1.GND@0 | U1.GND@0 40.84,10.57 43.18,10.57 U1.GND@1 43.28,10.77 44.81,12.29 44.81,23.98 45.52,24.69 45.72,24.69 | 58.57,31.55 58.01,32.11 C5.2 | 58.57,31.55 59.03,31.09 59.03,20.22 58.01,20.22 C4.2 | v53.34,33.43 53.34,35.15 52.93,35.56 IC2.14 | 58.57,31.55 v57.91,30.89 | 46.63,23.67 IC3.9 | IC3.9 46.63,23.37 46.94,23.06 46.94,22.35 47.35,21.95 52.83,21.95 52.83,23.57 IC3.14 | v52.73,52.12 53.95,50.9 C11.2 | v50.29,52.12 47.95,49.78 47.95,49.28 U2.8 47.95,49.07 46.63,47.75 46.63,35.66 IC2.9 46.53,35.36 46.53,35.26 45.72,34.44 45.72,33.33
  Bottom 0.508: 45.72,24.69 46.53,23.88 IC3.9 | 45.72,33.33 45.72,24.69 | v45.92,33.33 45.72,33.33 | v49.07,8.84 49.07,7.21 50.8,5.49 TOUCH.10
  pour Top: 0,0 100,0 100,69 0,69
  pour Bottom: 0,0 100,0 100,69 0,69
GPI1-1_3.3V  (via drill 0.3)
  Top 0.203: v91.14,47.14 93.47,44.81 95.3,44.81 96.52,43.59 U1.33
  Bottom 0.203: v91.14,47.14 91.14,48.67 90.93,48.87 U5.15
GPI1-1_5.0V  (via drill 0.3)
  Top 0.203: v90.42,50.49 92.35,52.43 v97.33,52.43
  Bottom 0.203: v90.42,50.49 90.42,49.07 90.32,48.97 U5.14 | v97.33,52.43 99.36,50.39 99.36,3.96 96.52,1.12 76.2,1.12 GPI1.3
GPI1-2_3.3V  (via drill 0.3)
  Top 0.203: v90.32,44.4 92.05,42.67 v92.46,42.67
  Bottom 0.203: v90.32,44.4 89.2,45.52 89.2,48.67 89,48.87 U5.12 | v92.46,42.67 93.98,41.15 U1.34
GPI1-2_5.0V  (via drill 0.3)
  Top 0.203: v97.33,49.89 v88.49,49.89
  Bottom 0.203: v88.49,49.89 88.49,49.07 88.39,48.97 U5.11 | v97.33,49.89 98.15,49.07 98.15,11.68 98.55,11.28 98.55,9.25 95.3,5.99 95.3,2.34 94.49,1.52 77.42,1.52 77.42,4.17 76.2,5.38 GPI1.4
GPO2-1_3.3V  (via drill 0.3)
  Top 0.203: v90.42,30.18 92.05,31.8 93.17,31.8 93.47,32.11 94.69,32.11 v95.2,32.61
  Bottom 0.203: v90.42,30.18 90.42,29.26 90.32,29.16 U6.3 | v95.2,32.61 95.2,34.65 93.98,35.87 U1.38
GPO2-1_5.0V  (via drill 0.3)
  Top 0.203: v87.68,20.93 v89.31,22.55 | v86.67,11.99 v86.67,13.21
  Bottom 0.203: v89.31,22.55 89.31,23.37 90.73,24.79 90.73,28.96 90.83,29.06 U6.2 | v87.68,20.93 86.36,19.61 86.36,13.51 v86.67,13.21 | v86.67,11.99 87.58,11.07 87.58,4.17 86.36,2.95 GPO2.3
GPO2-2_3.3V  (via drill 0.3)
  Top 0.203: v89.2,30.07 89.71,29.57 97.03,29.57 98.15,30.68 98.15,35.87 96.52,35.87 U1.39
  Bottom 0.203: v89.2,30.07 89.2,29.36 89,29.16 U6.5
GPO2-2_5.0V  (via drill 0.3)
  Top 0.203: v89.81,28.04 90.22,27.64 v92.35,27.64
  Bottom 0.203: v89.81,28.04 89.81,28.96 89.71,29.06 U6.4 | v92.35,27.64 92.25,27.53 92.25,15.14 89.71,12.6 85.14,12.6 85.14,6.71 86.36,5.49 GPO2.4
GPO3-1_3.3V  (via drill 0.3)
  Top 0.203: v91.44,33.33 93.98,33.33 U1.40
  Bottom 0.203: v91.44,33.33 87.88,29.77 87.88,29.36 87.68,29.16 U6.7
GPO3-1_5.0V  (via drill 0.3)
  Top 0.203: v88.49,28.04 89.51,27.03 v98.75,27.03
  Bottom 0.203: v88.49,28.04 88.49,28.96 88.39,29.06 U6.6 | v98.75,27.03 98.96,26.82 98.96,5.38 96.52,2.95 GPO3.3
GPO3-2_3.3V  (via drill 0.3)
  Top 0.203: v87.07,33.93 87.78,34.65 95.3,34.65 96.52,33.43 U1.41
  Bottom 0.203: v87.07,33.93 87.07,34.85 U6.9
GPO3-2_5.0V  (via drill 0.3)
  Top 0.203: v85.24,27.94 v87.68,30.38 | v82.6,9.14 84.23,7.52 94.49,7.52 96.52,5.49 GPO3.4
  Bottom 0.203: v87.68,30.38 87.68,34.85 U6.10 | v85.24,27.94 85.24,23.16 81.28,19.2 81.28,17.07 82.09,16.26 83.41,16.26 83.41,15.85 83.82,15.44 83.82,12.29 82.6,11.07 v82.6,9.14
MISO_3.3V  (via drill 0.3)
  Top 0.203: v52.32,38.3 49.58,35.56 v45.62,35.56 | v43.89,13.72 45.41,13.72 49.89,9.25 69.09,9.25 71.63,11.79 82.5,11.79 82.5,10.06 84.02,8.53 98.55,8.53 98.55,17.88 97.03,19.41 95.3,19.41 95.3,24.49 96.52,25.7 U1.47
  Bottom 0.203: v52.32,38.3 52.32,46.43 52.53,46.63 52.53,47.65 51.92,48.26 U2.2 | v45.62,35.56 43.38,33.33 43.38,16.15 42.42,15.19 | 42.42,15.19 42.27,15.04 41.35,15.04 41.35,15.85 U7.2 | 42.42,15.19 v43.89,13.72
MISO_5.0V
  Bottom 0.203: U2.3 51.31,49.07 51.31,37.9 50.39,36.98 50.39,35.66 IC2.12 50.39,35.56 51,34.95 51,24.28 50.39,23.67 IC3.12
MOSI_3.3V  (via drill 0.3)
  Top 0.203: v65.94,50.49 66.55,49.89 72.34,49.89 | 72.34,49.89 87.68,49.89 89.41,48.16 92.66,48.16 93.47,47.35 97.03,47.35 99.36,45.01 99.36,23.27 96.52,23.27 U1.49 | v40.03,35.46 43.48,38.91 54.15,38.91 63.3,48.06 68.68,48.06 69.49,48.87 70.51,48.87 70.71,48.67 71.12,48.67 72.34,49.89
  Bottom 0.203: v65.94,50.49 65.94,52.22 66.14,52.43 66.14,60.86 65.73,61.27 65.73,63.7 64.11,63.7 U3.3 | v40.03,35.46 40.03,22.15 U7.5
MOSI_5.0V  (via drill 0.3)
  Top 0.203: SERIAL2.8 73.76,63.8 65.84,63.8 v65.13,63.09 64.62,63.09 64.01,62.48 57.3,62.48 57.2,62.59 51.41,62.59 50.19,63.8 SERIAL.8 | v49.78,39.52 52.22,41.96 54.25,41.96 v60.35,48.06
  Bottom 0.203: IC3.11 49.07,23.67 49.07,28.65 48.46,29.26 48.46,34.95 49.07,35.56 IC2.11 49.17,35.66 49.78,36.27 v49.78,39.52 | v65.13,63.09 64.11,63.09 U3.2 64.01,63.09 63.5,63.09 62.28,61.87 62.28,49.99 v60.35,48.06
N$3
  Top 0.203: SJ6.2 84.63,37.19 82.6,37.19 UART3.9
N$6
  Top 0.203: SJ3.2 82.6,44.81 UART2.9
N$9
  Top 0.203: SJ2.2 84.63,52.43 82.6,52.43 UART1.9
N$10
  Top 0.203: SJ1.1 84.63,54.97 82.6,54.97 UART1.10
N$12
  Top 0.203: SJ4.1 82.6,47.35 UART2.10
N$13
  Top 0.203: SJ5.1 82.6,39.73 UART3.10
N$17
  Top 0.203: TOUCH.2 40.64,5.49 38.71,7.42 18.29,7.42 U$15.A2
  Bottom 0.203: R8.1 20.62,8.03 18.29,8.03 18.29,7.52 U$15.A2
N$22
  Top 0.203: TOUCH.6 45.72,5.38 44.5,4.17 20.02,4.17 18.29,2.44 U$15.A3
  Bottom 0.203: R7.1 20.62,2.03 18.29,2.03 18.29,2.34 U$15.A3
RESET
  Top 0.203: RESETA.3 11.99,23.47 14.43,23.47 RESET.3
  Bottom 0.203: U1.RESET 33.02,10.57 20.12,23.47 14.53,23.47 RESET.3
RXD1_3.3V  (via drill 0.3)
  Top 0.203: v50.7,47.85 51.71,46.84 58.32,46.84 60.15,48.67 v66.24,48.67 | v71.32,51.51 v69.09,51.51
  Bottom 0.203: v50.7,47.85 50.7,49.07 U2.4 | v69.09,51.51 v66.24,48.67 | v71.32,51.51 71.53,51.51 71.93,51.1 81.28,51.1 U1.19
RXD1_5.0V  (via drill 0.3)
  Top 0.203: v51.92,52.93 52.53,53.54 70.92,53.54 72.34,54.97 UART1.2
  Bottom 0.203: v51.92,52.93 51.92,50.7 51.21,50.7 50.19,49.68 50.19,49.38 49.99,49.17 U2.5
RXD2_3.3V  (via drill 0.3)
  Top 0.203: v50.19,55.88 50.7,56.39 75.59,56.39 v75.69,56.29
  Bottom 0.203: v50.19,55.88 50.19,55.17 49.99,54.97 U2.12 | v75.69,56.29 76.2,56.79 U1.17
RXD2_5.0V  (via drill 0.3)
  Top 0.203: v49.48,53.95 49.68,54.15 v67.97,54.15 | v69.7,48.26 70.51,47.45 72.34,47.45 UART2.2
  Bottom 0.203: v49.48,53.95 49.48,54.76 49.38,54.86 U2.11 | v67.97,54.15 69.7,52.43 v69.7,48.26
RXD3_3.3V  (via drill 0.3)
  Top 0.203: v54.46,55.68 54.56,55.78 v70.51,55.78
  Bottom 0.203: v54.46,55.68 52.32,55.68 52.12,55.47 52.12,55.07 52.02,54.97 U2.15 | v70.51,55.78 71.12,56.39 U1.15
RXD3_5.0V  (via drill 0.3)
  Top 0.203: v51.31,51.31 52.32,50.29 55.68,50.29 56.08,50.7 64.92,50.7 66.34,49.28 v70.92,49.28
  Bottom 0.203: v51.31,51.31 51.31,54.86 U2.14 | v70.92,49.28 71.12,49.07 71.12,41.05 72.34,39.83 UART3.2
SCL_3.3V
  Bottom 0.203: U1.21 86.36,59.74 87.58,60.96 Q2.2 87.68,61.06 87.88,61.06 89.2,62.38 89.2,65.23 88.8,65.63 R1.1
SCL_5.0V  (via drill 0.3)
  Top 0.203: v88.29,64.01 87.68,64.62 86.87,64.62 | v82.3,61.98 84.02,61.98 v86.67,64.62 86.87,64.62 | v55.47,60.96 57.2,59.23 57.2,57.51 81.79,57.51 82.6,58.32 82.6,60.55 85.55,60.55 86.87,61.87 86.87,64.62
  Bottom 0.203: v88.29,64.01 88.29,63.3 88.49,63.09 Q2.3 | v86.67,64.62 86.26,65.02 86.26,65.63 R3.1 | v82.3,61.98 78.94,61.98 78.94,63.8 SERIAL2.4 | v55.47,60.96 55.47,63.6 55.27,63.8 SERIAL.4
SCLK_3.3V  (via drill 0.3)
  Top 0.203: v59.74,43.69 51,34.95 v40.64,34.95 | v78.03,20.12 78.23,19.91 90.73,19.91 93.98,23.16 U1.48
  Bottom 0.203: v40.64,34.95 40.64,22.15 U7.6 | U3.5 64.01,65.02 59.74,65.02 v59.74,43.69 59.74,24.28 64.21,24.28 69.49,19 69.49,17.48 76.91,17.48 77.32,17.88 77.32,19.41 v78.03,20.12
SCLK_5.0V  (via drill 0.3)
  Top 0.203: 65.13,66.34 v65.13,65.02 | 65.13,66.34 73.76,66.34 SERIAL2.7 | 65.13,66.34 62.79,66.34 61.37,67.77 51.51,67.77 50.19,66.45 SERIAL.7 | v51.92,47.45 50.09,49.28 v46.94,49.28
  Bottom 0.203: IC3.13 51.71,23.67 51.82,23.77 51.82,28.75 52.22,29.16 52.22,35.05 51.71,35.56 IC2.13 51.71,35.66 51.71,47.24 v51.92,47.45 | v65.13,65.02 65.13,64.41 64.11,64.41 U3.4 | v46.94,49.28 47.35,49.68 47.35,56.08 49.48,58.22 49.48,62.79 48.97,63.3 48.97,65.23 50.09,66.34 SERIAL.7
SDA_3.3V  (via drill 0.3)
  Top 0.203: v89.81,64.31 84.33,58.83 83.82,58.83 U1.20
  Bottom 0.203: U1.20 83.82,60.76 84.02,60.96 Q1.2 | v89.81,64.31 89.81,64.82 90.63,65.63 R4.1
SDA_5.0V  (via drill 0.3)
  Top 0.203: v56.49,61.16 57.4,60.25 v63.8,60.25 | v64.21,52.93 64.41,53.14 71.32,53.14 71.93,53.75 v83.31,53.75
  Bottom 0.203: 84.58,63.45 84.53,63.5 84.53,65.63 R2.1 | 84.58,63.45 84.94,63.09 Q1.3 85.04,62.99 85.04,55.47 v83.31,53.75 | 84.58,63.45 84.53,63.4 82.8,63.4 82.8,63.3 81.99,62.48 80.16,62.48 80.16,65.13 78.94,66.34 SERIAL2.3 | v56.49,61.16 56.49,65.13 55.27,66.34 SERIAL.3 | v63.8,60.25 64.72,59.33 64.72,53.44 v64.21,52.93
SW1_3.3V  (via drill 0.3)
  Top 0.203: v89.81,42.06 93.27,42.06 93.47,42.27 95.3,42.27 96.52,41.05 U1.35
  Bottom 0.203: v89.81,42.06 89.81,42.98 89.71,43.08 U5.4
SW1_5.0  (via drill 0.3)
  Top 0.203: v89,36.17 87.88,35.05 86.26,35.05 85.55,34.34 v82.5,34.34
  Bottom 0.203: v89,36.17 89,43.08 U5.5 | v82.5,34.34 80.16,32 80.16,16.56 81.69,15.04 82.5,15.04 JOYSTICKS.1
SW2_3.3V  (via drill 0.3)
  Top 0.203: v90.73,39.42 91.64,38.51 93.98,38.51 U1.36
  Bottom 0.203: v90.73,39.42 90.73,42.98 90.83,43.08 U5.2
SW2_5.0  (via drill 0.3)
  Top 0.203: v91.14,44.4 91.24,44.5 v92.86,44.5 | v92.86,19.3 92.46,18.9 86.46,18.9 85.14,17.58 JOYSTICKS.4
  Bottom 0.203: v91.14,44.4 90.42,43.69 90.42,43.28 90.32,43.18 U5.3 | v92.86,44.5 93.17,44.5 93.47,44.81 97.74,44.81 97.74,20.12 97.03,19.41 92.86,19.41 v92.86,19.3
TXD1_3.3V  (via drill 0.3)
  Top 0.203: v74.47,60.45 74.88,60.05 77.52,60.05 78.74,58.83 U1.18
  Bottom 0.203: v74.47,60.45 72.24,62.69 72.24,66.95 70,66.95 U3.9
TXD1_5.0V
  Bottom 0.203: U3.10 69.9,66.34 69.09,66.34 69.09,67.16 69.39,67.46 72.64,67.46 72.64,63.09 75.08,60.66 75.08,59.44 74.88,59.23 74.88,56.69 73.66,55.47 73.66,53.75 74.88,52.53 UART1.3
TXD2_3.3V
  Bottom 0.203: U3.11 70,65.63 71.83,65.63 71.83,60.66 73.66,58.83 U1.16
TXD2_5.0V  (via drill 0.3)
  Top 0.203: v70.31,45.11 71.83,43.59 73.66,43.59 74.88,44.81 UART2.3
  Bottom 0.203: v70.31,45.11 70.31,52.32 69.9,52.73 69.9,59.23 69.09,60.05 69.09,65.02 69.9,65.02 U3.12
TXD3_3.3V  (via drill 0.3)
  Top 0.203: v68.48,64.41 v70.92,64.41
  Bottom 0.203: v70.92,64.41 70.92,63.8 70,63.8 U3.14 | v68.48,64.41 68.58,64.31 U1.14
TXD3_5.0V
  Bottom 0.203: U3.15 70,62.99 71.22,62.99 71.22,60.45 72.34,59.33 72.34,56.69 70.71,55.07 70.71,50.8 73.66,47.85 73.66,38.51 74.88,37.29 UART3.3
VIN  (via drill 0.61)
  Top 0.508: TOUCH.9 50.8,2.95 59.23,2.95 X2.2 | v45.92,8.03 46.13,7.82 v50.49,7.82
  Bottom 0.508: v45.92,8.03 45.92,10.26 45.72,10.46 U1.VIN | v50.49,7.82 52.32,5.99 52.32,4.47 50.8,2.95 TOUCH.9

## Text on the board
_tsilk: PCB-ARD-DUEBOS | v11-13proto | SKAARHOJ / 2013 | GND | 5V | 5V | 23 | 5V | 33 | 5V | 43 | 53 | TOUCH
_bsilk: GITHUB: SKAARHOJ-Open-Engineering